# EAGLE board FB-UPLpc936 (EAGLE 5.03)

Size 100 x 80 mm. Coordinates in mm from the lower left corner, seen from the top.
Outline: 12.23,45.68 38.59,45.68
Outline: 49.04,15.2 49.05,33.05
Outline: 14.57,1.3 36.37,1.3
Outline: 14.56,1.3 arc-44 1.62,15.49 1.62,32.88 arc-36 12.23,45.68
Outline: 38.59,45.68 arc-38 49.05,33.05
Outline: 49.04,15.21 arc-44 36.37,1.3
Outline: 0,0 100,0 100,80 0,80 0,0
Copper layers (1*16): Top 0.035mm / dielectric 1.5mm / Bottom 0.035mm
Design rules "default": minimum track width 10mil, minimum drill 24mil, track to track 8mil, track to pad 8mil, pad to pad 8mil, via to via 8mil, smd to smd 8mil, copper to edge 40mil, drill to drill 8mil, minimum pad ring 10mil, minimum via ring 8mil, stop-mask expansion 4mil, vias tented up to drill 0mil, thermal gap 10mil

## Footprints (pad centres in the part's own frame; a part is rotated, then mirrored left to right if it is on the bottom)
E2-5 = drill 0.813 pad 1.27 round: + -1.016,0 | drill 0.813 pad 1.27 octagon: - 1.016,0
C1206 = smd 1.6 x 1.8: 1 -1.4,0; 2 1.4,0
E2,5-7 = drill 0.813 pad 1.6 round: + -1.27,0 | drill 0.813 pad 1.6 octagon: - 1.27,0
MINIMELF = smd 1.4 x 1.8: A 1.7,0; C -1.7,0
SMB = smd 2.4 x 2.4: A 2.2,0; C -2.2,0
SOIC8 = smd 0.6 x 2.2: 1 -1.905,-2.6; 2 -0.635,-2.6; 3 0.635,-2.6; 4 1.905,-2.6; 5 1.905,2.6; 6 0.635,2.6; 7 -0.635,2.6; 8 -1.905,2.6
1X06 = drill 1.016 long: 1 -6.35,0; 2 -3.81,0; 3 -1.27,0; 4 1.27,0; 5 3.81,0; 6 6.35,0
1X10 = drill 1.016 long: 1 -11.43,0; 2 -8.89,0; 3 -6.35,0; 4 -3.81,0; 5 -1.27,0; 6 1.27,0; 7 3.81,0; 8 6.35,0; 9 8.89,0; 10 11.43,0
2200-11.43 = drill 0.8 pad 1.27 round: 1 -5.715,0; 2 5.715,0
SD12_1000 = drill 1.1 long: 1 -2.5,0; 2 2.5,0
SOT223 = smd 1.219 x 2.235: 1 -2.311,-3.099; 2 0,-3.099; 3 2.311,-3.099 | smd 3.6 x 2.2: 4 0,3.099
SOT23 = smd 1 x 1.4: 1 -0.95,-1.1; 2 0.95,-1.1; 3 0,1.1
SOT23-BEC = smd 1 x 1.4: B -0.95,-1.1; C 0,1.1; E 0.95,-1.1
R1206 = smd 1.6 x 1.803: 1 -1.422,0; 2 1.422,0
M1206 = smd 1.6 x 2: 1 -1.4,0; 2 1.4,0
TSSOP28 = smd 0.305 x 0.991: 1 -4.225,-2.918; 2 -3.575,-2.918; 3 -2.925,-2.918; 4 -2.275,-2.918; 5 -1.625,-2.918; 6 -0.975,-2.918; 7 -0.325,-2.918; 8 0.325,-2.918; 9 0.975,-2.918; 10 1.625,-2.918; 11 2.275,-2.918; 12 2.925,-2.918; 13 3.575,-2.918; 14 4.225,-2.918; 15 4.225,2.918; 16 3.575,2.918; 17 2.925,2.918; 18 2.275,2.918; 19 1.625,2.918; 20 0.975,2.918; 21 0.325,2.918; 22 -0.325,2.918; 23 -0.975,2.918; 24 -1.625,2.918; 25 -2.275,2.918; 26 -2.925,2.918; 27 -3.575,2.918; 28 -4.225,2.918

## Placement (x,y rotation side)
C1  RAD 105 47/35  [E2-5]  25.97,28.06 90 top
C2  100n  [C1206]  64.01,76 0 top
C3  100n  [C1206]  11.55,60.59 90 top
C4  100n  [C1206]  23.71,75.53 0 top
C5  470p  [C1206]  62.22,45.8 180 top
C6  100µ  [E2,5-7]  13.97,25.76 90 top
D1  BAT46  [MINIMELF]  36.39,75.23 0 top
D2  MBRS140  [SMB]  62.37,58.81 0 top
D3  SMD ZF 7,5  [MINIMELF]  61.74,62.37 0 top
D7  MBRS140  [SMB]  48.45,57.35 90 top
D8  MBRS140  [SMB]  43.99,57.14 90 top
IC1  MC34063AD  [SOIC8]  62.97,51.74 0 top
JP2  ISP  [1X06]  91.75,64.96 270 top
JP3  ISP  [1X06]  70.62,42.79 90 top
JP4  IO1  [1X10]  25.95,12.37 0 top
JP5  IO2  [1X10]  25.95,15.66 0 top
L1  220µH  [2200-11.43]  16.34,14.09 270 top
L2  150mH  [SD12_1000]  34.17,24.26 270 top
Q1  BCP52  [SOT223]  74.95,72.78 180 top
Q3  2N7002  [SOT23]  13.07,75.56 0 top
Q4  BC856  [SOT23-BEC]  66.47,71.24 270 top
R1  2k2  [R1206]  69.62,54.88 270 top
R2  100  [M1206]  67.78,65.45 180 top
R3  100k  [M1206]  43.84,50.18 90 top
R4  30  [R1206]  40.07,50.18 270 top
R5  220k  [R1206]  9.65,74.49 270 top
R6  12k  [M1206]  11.55,55.08 90 top
R7  82k  [R1206]  29.26,75.42 180 top
R8  47k  [M1206]  45.53,74.95 0 top
R9  10k  [R1206]  29.21,72.35 0 top
R10  5k6  [M1206]  61.75,65.41 0 top
R12  47k  [M1206]  23.8,72.35 0 top
R14  1R  [M1206]  9.68,68.73 90 top
R18  47k  [M1206]  23.59,68.45 0 top
R20  3k3  [M1206]  23.59,63.86 180 top
U$1  [TSSOP28]  90.28,22.4 270 top

## Library data of the parts
C1-C6 L1 R1-R10 R12 R14 R18 R20 = rcl
D1-D3 D7 D8 = diode
IC1 = mc34063
JP2-JP5 = pinhead
L2 = inductor-neosid
Q1 Q4 = transistor-pnp
Q3 = transistor-small-signal
U$1 = freebuslpc

## Nets
GND: C1.- C4.1 C5.2 C6.- D1.A IC1.4 JP3.6 JP5.2 Q3.2 Q4.C R1.1 R3.1 R6.1 R8.1 U$1.7
N$1: Q4.E R9.2 U$1.10
N$2: C2.2 Q4.B R7.1 R8.2
N$3: IC1.5 R1.2 R20.1
N$4: IC1.1 IC1.7 IC1.8 R14.1
N$5: C3.2 U$1.5
N$6: Q1.2 Q3.3 R10.1
N$7: C6.+ D2.A IC1.6 JP5.6 L2.2 R5.2 R14.2
N$8: D7.C L2.1
N$9: C2.1 D8.C R3.2 R4.1
N$10: D1.C IC1.2 L1.2
N$11: D3.A R2.1 R10.2
N$12: Q1.3 R4.2
N$13: C5.1 IC1.3
N$14: Q1.1 R2.2
N$15: JP2.1 U$1.4
N$16: D7.A D8.A JP5.3
N$17: JP5.4 U$1.14
N$18: JP2.2 U$1.3
N$19: JP2.3 U$1.2
N$20: JP2.4 U$1.1
N$21: JP4.10 U$1.16
N$22: JP5.9 U$1.15
N$23: JP4.8 U$1.20
N$24: JP5.8 U$1.13
N$25: JP2.5 U$1.8
N$26: JP2.6 U$1.9
N$29: JP3.4 U$1.18
N$30: JP3.5 U$1.17
N$31: JP3.3 U$1.6
N$32: JP3.2 U$1.21
N$33: JP5.5 JP5.10 R18.2 U$1.12
N$34: C3.1 Q3.1 R5.1 R6.2
N$40: D2.C D3.C
N$42: JP5.7 R12.2 U$1.11
P0.0: JP4.1 U$1.28
P0.1: JP4.2 U$1.27
P0.2: JP4.3 U$1.26
P0.3: JP4.4 U$1.25
P0.4: JP4.5 U$1.24
P0.5: JP4.6 U$1.23
P0.6: JP4.7 U$1.22
P0.7: JP4.9 U$1.19
VCC: C1.+ C4.2 JP3.1 JP5.1 L1.1 R7.2 R9.1 R12.1 R18.1 R20.2

## Tracks (layer width: path | path; a pad name or v marks a point on that pad's centre or on a via)
GND  (14 unrouted)
N$1  (2 unrouted)
N$2  (3 unrouted)
N$3  (2 unrouted)
N$4  (3 unrouted)
N$5  (1 unrouted)
N$6  (2 unrouted)
N$7  (6 unrouted)
N$8  (1 unrouted)
N$9  (3 unrouted)
N$10  (2 unrouted)
N$11  (2 unrouted)
N$12  (1 unrouted)
N$13  (1 unrouted)
N$14  (1 unrouted)
N$15  (1 unrouted)
N$16  (2 unrouted)
N$17  (1 unrouted)
N$18  (1 unrouted)
N$19  (1 unrouted)
N$20  (1 unrouted)
N$21  (1 unrouted)
N$22  (1 unrouted)
N$23  (1 unrouted)
N$24  (1 unrouted)
N$25  (1 unrouted)
N$26  (1 unrouted)
N$29  (1 unrouted)
N$30  (1 unrouted)
N$31  (1 unrouted)
N$32  (1 unrouted)
N$33  (3 unrouted)
N$34  (3 unrouted)
N$40  (1 unrouted)
N$42  (2 unrouted)
P0.0  (1 unrouted)
P0.1  (1 unrouted)
P0.2  (1 unrouted)
P0.3  (1 unrouted)
P0.4  (1 unrouted)
P0.5  (1 unrouted)
P0.6  (1 unrouted)
P0.7  (1 unrouted)
VCC  (9 unrouted)